# Altium PCB Receiver_STC12C5608AD.PcbDoc
Units mil, origin at the board's own origin, x right, y up, seen from the top; angles counter-clockwise.
Board outline 1030 x 1285 mil, 2 copper layers (Top Layer, Bottom Layer); 14 components, 28 nets, 95 pads, 17 vias.
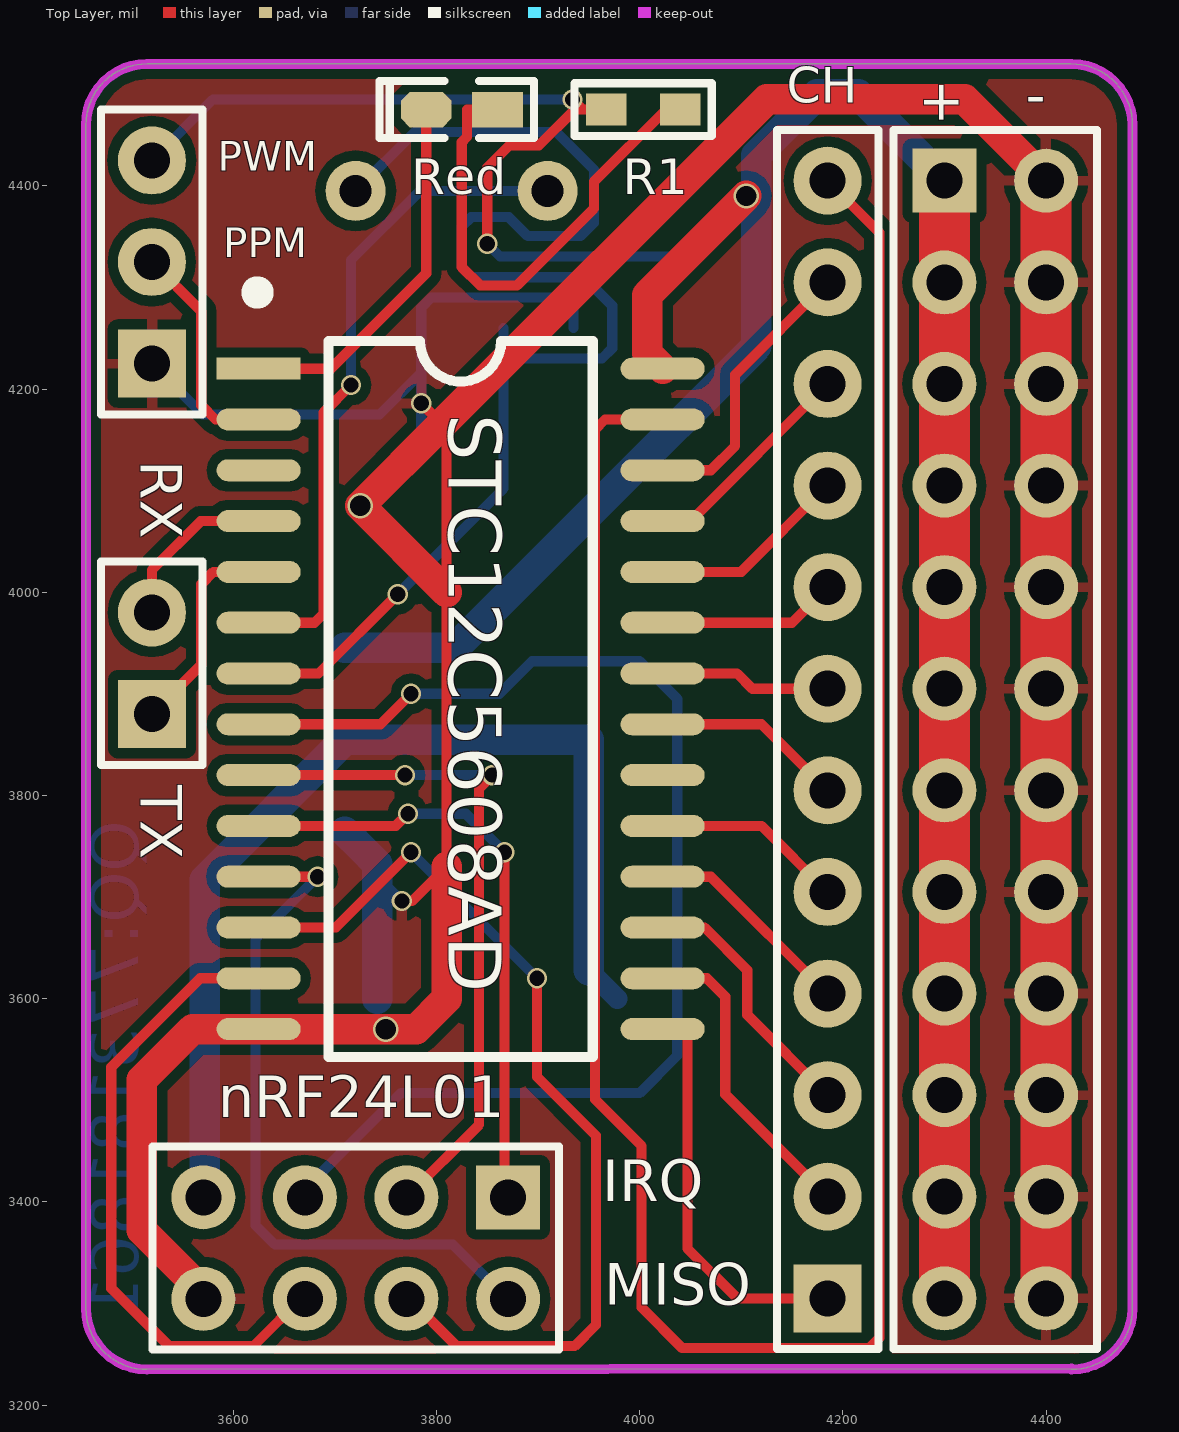
[diagram p0: Top Layer view]
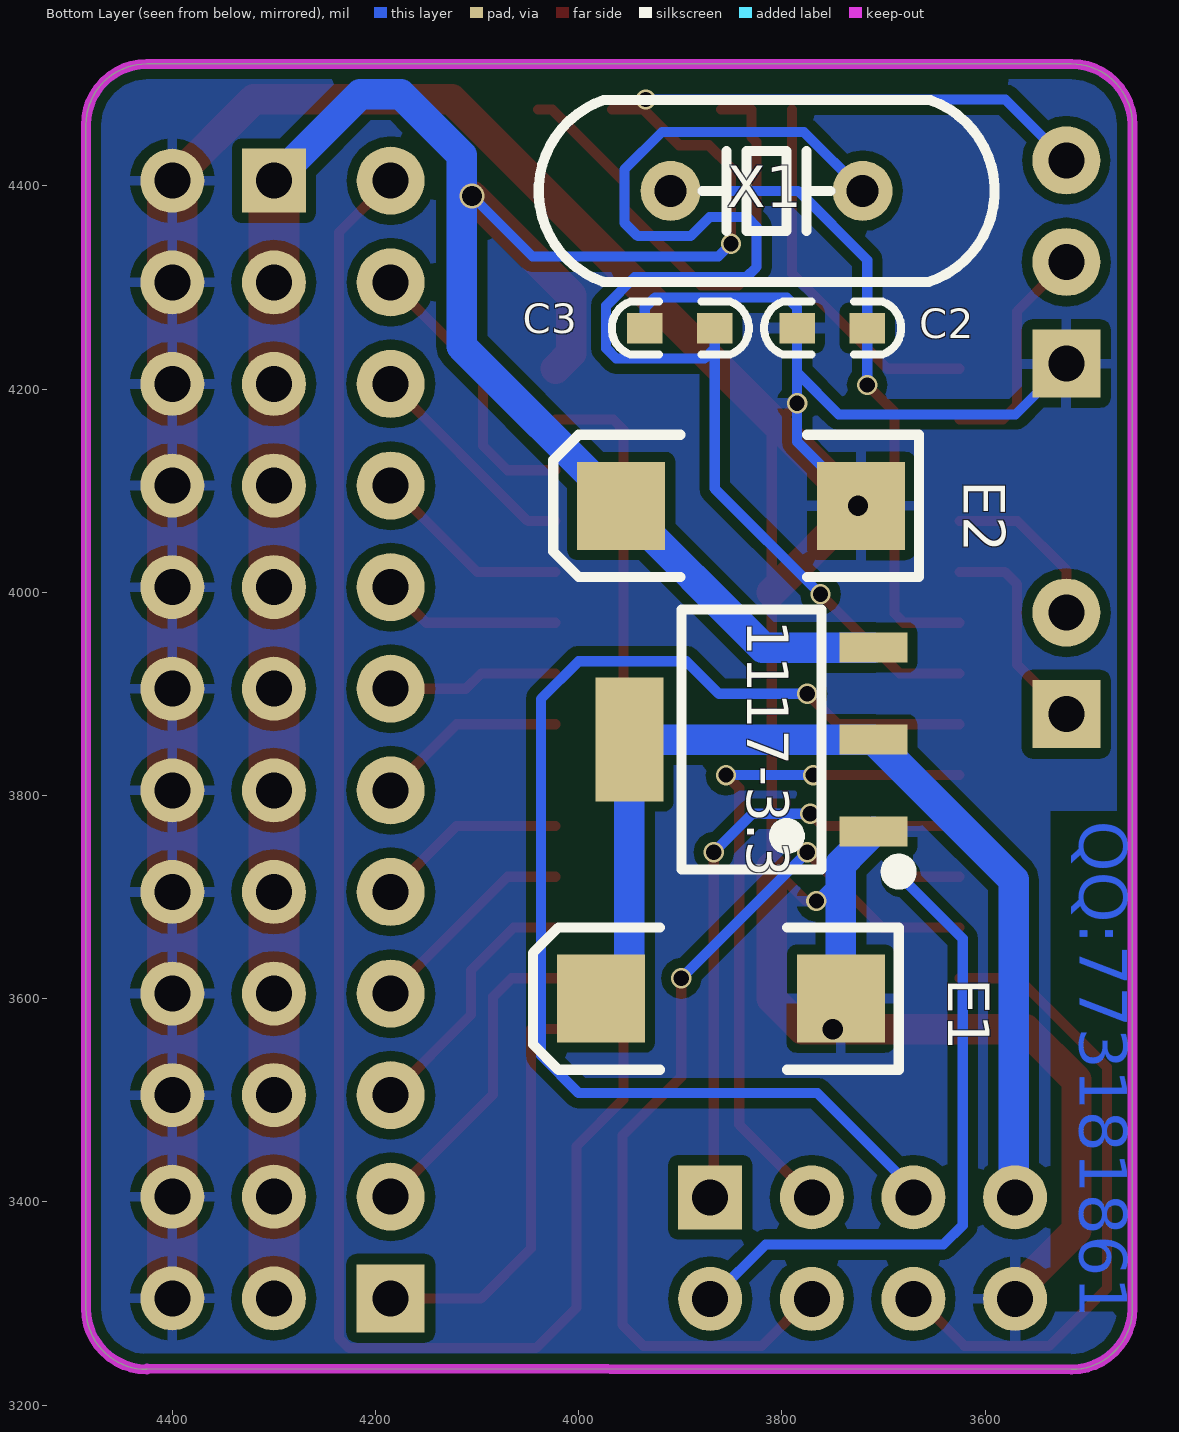
[diagram p1: Bottom Layer view, seen from below]

## Layer stack, top to bottom
Top Solder: solder mask 0.4, Solder Resist, Dk 3.5
Top Layer: signal copper 1.4
Dielectric 1: dielectric 12.6, FR-4, Dk 4.8
Bottom Layer: signal copper 1.4
Bottom Solder: solder mask 0.4, Solder Resist, Dk 3.5

## Board outline
3455,3295 3455,4460 cw(c3515,4460) 3515,4520 4425,4520 cw(c4425,4460) 4485,4460 4485,3295 cw(c4425,3295) 4425,3235 4425,3235.85 3515,3235 cw(c3515,3295)

## Design rules (kind name [scope] priority, off if disabled: settings)
Clearance [All] p1: gap=10 ignorepadtopadclearanceinfootprint=FALSE except(0: Arc-Hole Track-Hole SMDPad-Hole THPad-Hole Via-Hole Fill-Hole Poly-Hole Region-Hole Text-Hole)
HoleSize [All] p1: absolutevalues=TRUE maxlimit=150 minlimit=1 maxpercent=80.000 minpercent=20.000
HoleToHoleClearance [All] p1: gap=1 allowstackedmicrovias=TRUE
MinimumSolderMaskSliver [All] p1: minsoldermaskwidth=1
NetAntennae [All] p1: netantennaetolerance=2
PolygonConnect [All] p1: connectstyle=Relief reliefconductorwidth=10 reliefentries=4 polygonreliefangle="90 Angle" airgapwidth=10
RoutingVias [All] p1: holewidth=15 width=20 viastyle="Through Hole" minholewidth=28 minwidth=50 maxholewidth=28 maxwidth=50
SilkToSilkClearance [All] p1: silktosilkclearance=0
SilkToSolderMaskClearance [IsPad] p1: minsilkscreentomaskgap=0 clearancetoexposedcopper=TRUE
SolderMaskExpansion [All] p1: expansion=4
Width [All] p1: maxlimit=120 minlimit=6 preferedwidth=10
24 further rules are at their usual default settings.

## Components (designator, comment, footprint, x,y, rotation, side; value= is the part's Value field where it differs from the comment)
1117-3.3 "AMS1117-3V3" SOT223_L 3830,3855 r90 bottom
C2 "22pF" "C 0603" 3750,4260 r180 bottom
C3 "22pF" "C 0603" 3900,4260 r180 bottom
CH "HDR-1X12" HDR-1X12 4185,3305 r90 top
E1 "100uF/10V" "CD C(6032)" 3860,3600 r180 bottom
E2 "100uF/10V" "CD C(6032)" 3840,4085 r180 bottom
nRF24L01 "Header 4X2" HDR-4X2 3870.5,3404.5 r180 top
POWER "Header 2X11" HDR-12X2 4300,4405 r270 top
PWM "key" HDR-1X3 3520,4225 r90 top
R1 "1K" "R 0603" 4003.5,4475 r0 top
Red "红色" "LED 0603R" 3825,4475.26 r180 top
RX "HDR-1X2" HDR-1X2 3520,3880 r90 top (schematic designator UART)
STC12C5608AD "STC12C5608AD" SOP28_N 3823.82,3895 r0 top
X1 "12MHz" "XTAL-49S DIP" 3815,4395 r0 bottom

## Footprints (in the part's own frame and the unit in brackets; to place one, negate y for a bottom-side part, rotate by r counter-clockwise, add the part's x,y. Pads: shape width x height; smd on the part's side, far side on the other; paste and mask are expansions set on the pad)
"C 0603" [mil] "无极性贴片电容"
  rect 35x30 smd: 1(-35,0) 2(34,0)
  silkscreen extent -67,-26 67,26, body extent -31,-16 31,16, height 32
"CD C(6032)" [mm] "长6.0mm，宽3.2mm，厚2.5mm"
  rect 2.2x2.2 smd: 1(-3,0) 2(3,0)
  silkscreen extent -4.7,-1.78 4.44,1.78, body extent -3,-1.6 3,1.6, height 2.5
HDR-1X2 [mm] "排针，2脚"
  rect 1.7x1.7 hole 0.9: 1(0,0)
  round 1.7 hole 0.9: 2(2.54,0)
  silkscreen extent -1.27,-1.27 3.81,1.27, body extent -1.27,-1.27 3.81,1.27, height 8.5
HDR-1X3 [mm] "排针，3脚"
  rect 1.7x1.7 hole 0.9: 1(0,0)
  round 1.7 hole 0.9: 2(2.54,0) 3(5.08,0)
  silkscreen extent -1.27,-1.27 6.35,1.27, body extent -1.27,-1.27 6.35,1.27, height 8.5
HDR-1X12 [mm] "排针，13脚"
  rect 1.7x1.7 hole 0.9: 1(0,0)
  round 1.7 hole 0.9: 2(2.54,0) 3(5.08,0) 4(7.62,0) 5(10.16,0) 6(12.7,0) 7(15.24,0) 8(17.78,0) 9(20.32,0) 10(22.86,0) 11(25.4,0) 12(27.94,0)
  silkscreen extent -1.27,-1.27 29.21,1.27, body extent -1.27,-1.27 29.21,1.27, height 8.5
HDR-4X2 [mm] "双排排针，4x2脚"
  rect 1.6x1.6 hole 0.9: 1(0,0)
  round 1.6 hole 0.9: 2(0,2.54) 3(2.54,0) 4(2.54,2.54) 5(5.08,0) 6(5.08,2.54) 7(7.62,0) 8(7.62,2.54)
  silkscreen extent -1.27,-1.27 8.89,3.81, body extent -1.27,-1.27 8.89,3.81, height 8.5
HDR-12X2 [mm] "双排排针，12x2脚"
  rect 1.6x1.6 hole 0.9: 1(0,0)
  round 1.6 hole 0.9: 2(0,2.54) 3(2.54,0) 4(2.54,2.54) 5(5.08,0) 6(5.08,2.54) 7(7.62,0) 8(7.62,2.54) 9(10.16,0) 10(10.16,2.54) 11(12.7,0) 12(12.7,2.54) 13(15.24,0) 14(15.24,2.54) 15(17.78,0) 16(17.78,2.54) 17(20.32,0) 18(20.32,2.54) 19(22.86,0) 20(22.86,2.54) 21(25.4,0) 22(25.4,2.54) 23(27.94,0) 24(27.94,2.54)
  silkscreen extent -1.27,-1.27 29.21,3.81, body extent -1.27,-1.27 29.21,3.81, height 8.5
"LED 0603R" [mil] "红色0603LED"
  rect 50x35 smd: 1(-35,0.26)
  oct 50x35 smd: 2(35,0.26)
  silkscreen extent -71,-28 81,28, body extent -31,-16 32,16, height 24
"R 0603" [mil] "1/10W贴片电阻"
  rect 40x31.5 smd: 1(-36.5,0) 2(36.5,0)
  silkscreen extent -68,-26 68,26, body extent -31,-16 32,16, height 16
SOP28_N [mm] "17.9*10.6*2.6mm（长宽高）"
  rect 2.1x0.55 smd: 1(-5.05,8.255)
  oval 2.1x0.55 smd: 2(-5.05,6.985) 3(-5.05,5.715) 4(-5.05,4.445) 5(-5.05,3.175) 6(-5.05,1.905) 7(-5.05,0.635) 8(-5.05,-0.635) 9(-5.05,-1.905) 10(-5.05,-3.175) 11(-5.05,-4.445) 12(-5.05,-5.715) 13(-5.05,-6.985) 14(-5.05,-8.255) 15(5.05,-8.255) 16(5.05,-6.985) 17(5.05,-5.715) 18(5.05,-4.445) 19(5.05,-3.175) 20(5.05,-1.905) 21(5.05,-0.635) 22(5.05,0.635) 23(5.05,1.905) 24(5.05,3.175) 25(5.05,4.445) 26(5.05,5.715) 27(5.05,6.985) 28(5.05,8.255)
  silkscreen extent -5.23,-8.95 3.3,10.31, body extent -5.15,-8.95 5.15,8.95, height 2.7
SOT223_L [mm] "6.4x7x1.6mm(长宽高)"
  rect 0.75x1.7 smd: 1(-2.3,-3.048) 2(0,-3.048) 3(2.3,-3.048)
  rect 3.1x1.7 smd: 2(0,3.048)
  silkscreen extent -3.5,-3.88 3.25,1.75, body extent -3.25,-3.51 3.25,3.51, height 1.65
"XTAL-49S DIP" [mm]
  round 1.5 hole 0.8: 1(-2.4,0) 2(2.4,0)
  silkscreen extent -5.7,-2.28 5.7,2.28, body extent -5.68,-2.35 5.67,2.3, height 3.5

## Part data
1117-3.3: library part AMS1117, "三端稳压芯片", BOM名称=稳压芯片, 学习资源=www.ooocke.com, 版权归属=源创客
C2 C3: library part C, "无极性贴片电容", BOM名称=无极性贴片电容, 学习资源=www.ooocke.com, 版权归属=源创客
CH: library part "Header 12", "12P接插件", BOM名称=12P接插件, 学习资源=www.ooocke.com, 版权归属=源创客
E1 E2: library part C-CD, "贴片钽电容", BOM名称=贴片钽电容, 学习资源=www.ooocke.com, 版权归属=源创客
nRF24L01: "4*2P接插件", BOM名称=4*2P接插件, 学习资源=www.ooocke.com, 版权归属=源创客
POWER: library part "Header 12X2", "12*2P接插件", BOM名称=12*2P接插件, 学习资源=www.ooocke.com, 版权归属=源创客
PWM: library part KEY
R1: library part R, "贴片电阻", BOM名称=贴片电阻, 学习资源=www.ooocke.com, 版权归属=源创客
Red: library part LED-SMD, "贴片LED", BOM名称=贴片LED, 学习资源=www.ooocke.com, 版权归属=源创客
RX: library part "Header 2", "2P接插件", BOM名称=2P接插件, 学习资源=www.ooocke.com, 版权归属=源创客
STC12C5608AD: library part STC12C520xAD-28pin, "STC带AD单片机", BOM名称=STC带AD单片机, 学习资源=www.ooocke.com, 版权归属=源创客
X1: library part XTAL-2, "2脚晶振", BOM名称=2脚晶振, 学习资源=www.ooocke.com, 版权归属=源创客

## Via types
v1: diameter 20, hole 15, Top Layer to Bottom Layer, 14 vias
v2: diameter 25, hole 20, Top Layer to Bottom Layer, 3 vias

## Nets (pads, with @x,y where several pads share a name; then routed paths per layer and width w, separated by ;. In a path a pad name is that pad's centre, name@x,y a point inside that pad or via, vN(x,y) a via of type N, cw(c..) or ccw(c..) an arc to the next point about the centre after c; other vN are vias at no path point)
3V3: 1117-3.3.2 E1.1 nRF24L01.7 | length 1013.8
  Bottom Layer w20: E1.1@3950,3628.11 E1.1
  Bottom Layer w30: nRF24L01.7@3572,3405 3572,3717 3710,3855 3950,3855 E1.1@3950,3628.11
5V: 1117-3.3.3 E2.1 POWER.1 POWER.3 POWER.5 POWER.7 POWER.9 POWER.11 POWER.13 POWER.15 POWER.17 POWER.19 POWER.21 POWER.23 PWM.3 R1.1 STC12C5608AD.28 | length 3231
  Top Layer w10: v1(3850,4343) 3850,4418 3872,4440 3901,4440 3936,4475 3944,4475 ; v1(3934,4485) 3944,4475 ; R1.1 3944,4475
  Top Layer w30: STC12C5608AD.28 4007.5,4235.14 4007.5,4292.5 v2(4105,4390)
  Top Layer w50: POWER.23 POWER.21 POWER.19 POWER.17 POWER.15 POWER.13 POWER.11 POWER.9 POWER.7 POWER.5 POWER.3 POWER.1
  Bottom Layer w10: PWM.3 3580,4485 v1(3934,4485) ; v1(3850,4343) 3862.53,4330.47 4045.47,4330.47 v2(4105,4390)
  Bottom Layer w30: 1117-3.3.3 3818.66,3945.55 E2.1 4115,4241.89 4115,4430 4175,4490 4215,4490 POWER.1
CE: nRF24L01.6 STC12C5608AD.13 | length 632.1
  Top Layer w10: 3620.5,3258 3537,3258 3480,3315 3480,3532.43 3567.57,3620 STC12C5608AD.13 ; 3620.5,3258.5 nRF24L01.6@3669.5,3307.5
CH1: CH.12 STC12C5608AD.27 | length 2368.7
  Top Layer w10: STC12C5608AD.27 3966,4170 3956,4160 3956,3501 4002,3455 4002,3296 4042,3256 4226,3256 4236,3266 4236,4354 CH.12
CH2: CH.11 STC12C5608AD.26 | length 280
  Top Layer w10: STC12C5608AD.26 4070,4120 4094,4144 4094,4214 CH.11
CH3: CH.10 STC12C5608AD.25 | length 218.3
  Top Layer w10: STC12C5608AD.25 4050,4070 CH.10
CH4: CH.9 STC12C5608AD.24 | length 197.6
  Top Layer w10: STC12C5608AD.24 4100,4020 CH.9
CH5: CH.8 STC12C5608AD.23 | length 176.9
  Top Layer w10: STC12C5608AD.23 4150,3970 CH.8
CH6: CH.7 STC12C5608AD.22 | length 168.6
  Top Layer w10: STC12C5608AD.22 4096,3920 4111,3905 CH.7
CH7: CH.6 STC12C5608AD.21 | length 189.3
  Top Layer w10: STC12C5608AD.21 4120,3870 CH.6
CH8: CH.5 STC12C5608AD.19 | length 189.3
  Top Layer w10: STC12C5608AD.19 4120,3770 CH.5
CH9: CH.4 STC12C5608AD.18 | length 210
  Top Layer w10: STC12C5608AD.18 4070,3720 CH.4
CH10: CH.3 STC12C5608AD.17 | length 256.5
  Top Layer w10: STC12C5608AD.17 4064,3670 4106,3628 4106,3584 CH.3
CH11: CH.2 STC12C5608AD.16 | length 307.7
  Top Layer w10: STC12C5608AD.16 4066,3620 4084.22,3601.78 4084.22,3505.78 CH.2
CH12: CH.1 STC12C5608AD.15 | length 398.7
  Top Layer w10: STC12C5608AD.15 4047,3570 4047,3354 4096,3305 CH.1
CSN: nRF24L01.5 STC12C5608AD.8 | length 1230.6
  Top Layer w10: STC12C5608AD.8 3745,3870 v1(3775,3900)
  Bottom Layer w10: nRF24L01.5@3666.5,3408.5 3765,3507 4000,3507 4037,3544 4037,3895 4000,3932 3894,3932 3862,3900 v1(3775,3900)
GND: 1117-3.3.1 C2.1 C3.1 E1.2 E2.2 nRF24L01.8 POWER.2 POWER.4 POWER.6 POWER.8 POWER.10 POWER.12 POWER.14 POWER.16 POWER.18 POWER.20 POWER.22 POWER.24 PWM.1 STC12C5608AD.14 | length 4301.6
  Top Layer w10: v1(3766,3696) 3776,3696 3810,3730 3810,4000 3810,4161 3805.5,4165.5 v1(3785,4186)
  Top Layer w30: nRF24L01.8@3574.5,3307.5 3510,3372 3510,3520 3560,3570 STC12C5608AD.14 v2(3750,3570) 3780,3570 3810,3600 3810,3730 ; 3810,4000 v2(3725,4085) 3805.5,4165.5 4125,4485 4320,4485 POWER.2
  Top Layer w50: POWER.24 POWER.22 POWER.20 POWER.18 POWER.16 POWER.14 POWER.12 POWER.10 POWER.8 POWER.6 POWER.4 POWER.2
  Bottom Layer w10: PWM.1 3570,4175 3744,4175 3785,4216 ; 1117-3.3.1 3726,3764.45 3726,3748.45 3726,3736 3741.89,3720.11 v1(3766,3696) ; E2.2 3785,4148.11 v1(3785,4186) 3785,4216 ; C3.1 3935,4280 3925,4290 3795,4290 3785,4280 C2.1 3785,4216
  Bottom Layer w30: 1117-3.3.1 3726,3748.45 3741.89,3732.56 3741.89,3720.11 E1.2
IRQ: nRF24L01.1 STC12C5608AD.10 | length 628.6
  Top Layer w10: STC12C5608AD.10 3760,3770 v1(3772,3782) ; v1(3867,3744) 3867,3417 nRF24L01.1@3894.5,3389.5
  Bottom Layer w10: v1(3772,3782) 3829,3782 v1(3867,3744)
MISO: nRF24L01.2 STC12C5608AD.11 | length 707.6
  Top Layer w10: STC12C5608AD.11 v1(3683,3720)
  Bottom Layer w10: v1(3683,3720) 3622,3659 3622,3377 3641,3358 3816,3358 3866.5,3307.5 nRF24L01.2@3874.5,3307.5
MOSI: nRF24L01.3 STC12C5608AD.9 | length 680.5
  Top Layer w10: STC12C5608AD.9 v1(3769,3820) ; nRF24L01.3 3842,3476 3842,3807 v1(3855,3820)
  Bottom Layer w10: v1(3769,3820) v1(3855,3820)
NetC2_2: C2.2 STC12C5608AD.6 X1.2 | length 648.6
  Top Layer w10: STC12C5608AD.6 3680,3970 3689,3979 3689,4177 v1(3716,4204)
  Bottom Layer w10: v1(3716,4204) C2.2 3716,4327 3784,4395 X1.2
NetC3_2: C3.2 STC12C5608AD.7 X1.1 | length 1308.6
  Top Layer w10: STC12C5608AD.7 3684,3920 v1(3762,3998)
  Bottom Layer w10: X1.1 3778.51,4453 3918,4453 3955,4416 3955,4363.73 3941.74,4350.47 3889.99,4350.47 3871.26,4369.2 3834.2,4369.2 3825,4360 3825,4320 3835,4310 3945,4310 3973,4282 3973,4240 3963,4230 3876,4230 3866,4240 ; v1(3762,3998) 3866,4102 3866,4240 ; C3.2 3866,4240
NetR1_2: R1.2 Red.1 | length 496.7
  Top Layer w10: Red.1 3830,4475 3830,4448 3825,4443 3825,4320 3843,4302 3879.46,4302 3955,4377.54 3955,4404 4026,4475 R1.2
NetRed_2: Red.2 STC12C5608AD.1 | length 364.9
  Top Layer w10: STC12C5608AD.1 3696,4220 3790,4314 Red.2
P23: PWM.2 STC12C5608AD.2 | length 223.4
  Top Layer w10: PWM.2 3568.54,4276.46 3568.54,4184 3582.54,4170 STC12C5608AD.2
RXD: RX.2 STC12C5608AD.4 | length 166.9
  Top Layer w10: RX.2 3520,4022 3568,4070 STC12C5608AD.4
SCK: nRF24L01.4 STC12C5608AD.12 | length 933.9
  Top Layer w10: STC12C5608AD.12 3701,3670 v1(3775,3744) ; nRF24L01.4@3772.5,3305.5 3820,3258 3936,3258 3957,3279 3957,3465 3899,3523 v1(3899,3620)
  Bottom Layer w10: v1(3775,3744) v1(3899,3620)
TXD: RX.1 STC12C5608AD.5 | length 209.6
  Top Layer w10: RX.1 3568.47,3928.47 3568.47,4008 3580.47,4020 STC12C5608AD.5
pads on no net: STC12C5608AD.3 STC12C5608AD.20

## Polygon pours and split planes (outlines as drawn)
GND on Top Layer "Top Layer-No Net" (solid, remove dead copper, pour order 8): 3294,3157 3261,3190 3261,4633 4585,4633 4687,4531 4687,3192
GND on Bottom Layer "Top Layer-No Net" (solid, remove dead copper, pour order 10): 3354,4606 4652,4606 4683,4575 4561,4453 4561,3142 3409,3142 3387,3164

## Keep-outs
Keep-Out Layer:
  lines w10: 4425,3235 ccw(c4425,3295) 4485,3295 4485,4460 ccw(c4425,4460) 4425,4520 3515,4520 ccw(c3515,4460) 3455,4460 3455,3295 ccw(c3515,3295) 3515,3235 4425,3235.85

## Other copper
Bottom Layer:
  text "QQ:773181861" at 3522,3775 h80 r90

## Silkscreen, mask and mechanical layers (free items; w line width, h text height)
Top Overlay:
  text "PPM" at 3590,4320 h50
  text "TX" at 3495,3810 h70 r270
  text "IRQ" at 3963,3387 h70
  text "MISO" at 3965,3285 h70
Bottom Solder:
  text "QQ:773181861" at 3522,3775 h80 r90

## Text inside footprints (layer, text, board x,y; h text height)
POWER: Top Overlay "+" at 4280,4505 h40 r270; Top Overlay "-" at 4380,4470 h40